# Altium PCB stm32f107rct7_devbrd.PcbDoc
Units mm, origin at the board's own origin, x right, y up, seen from the top; angles counter-clockwise.
Board outline 70 x 40 mm, 2 copper layers (Top Layer, Bottom Layer); 37 components, 65 nets, 219 pads, 61 vias.
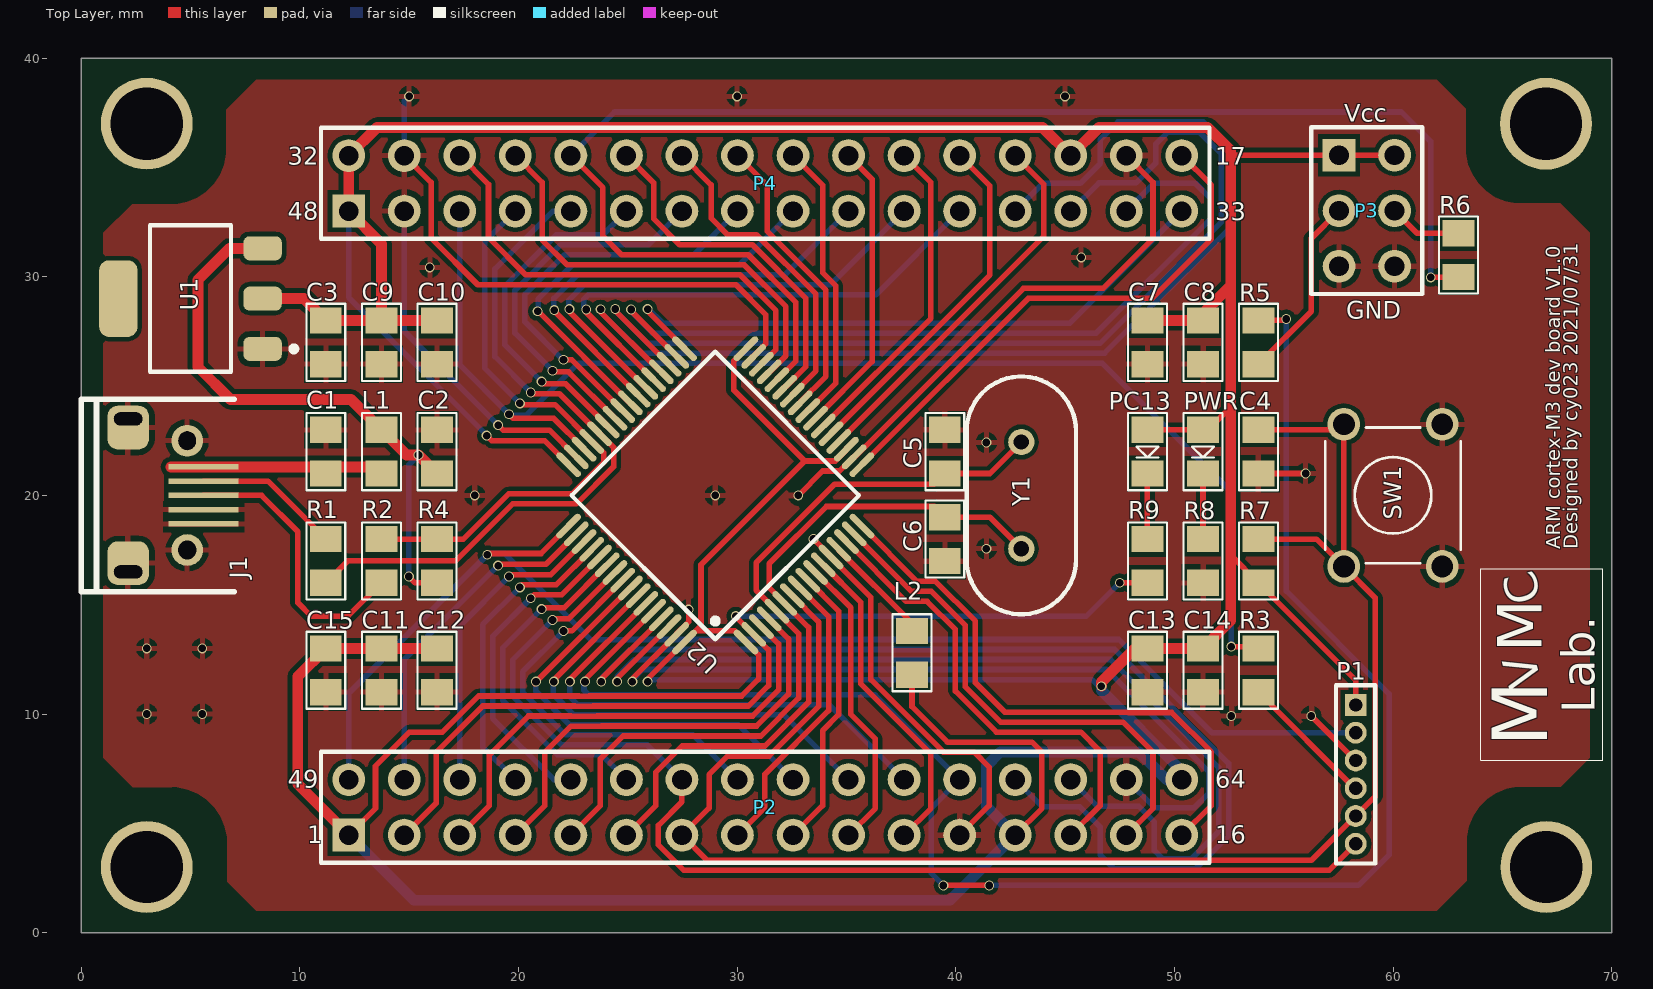
[diagram p0: Top Layer view]
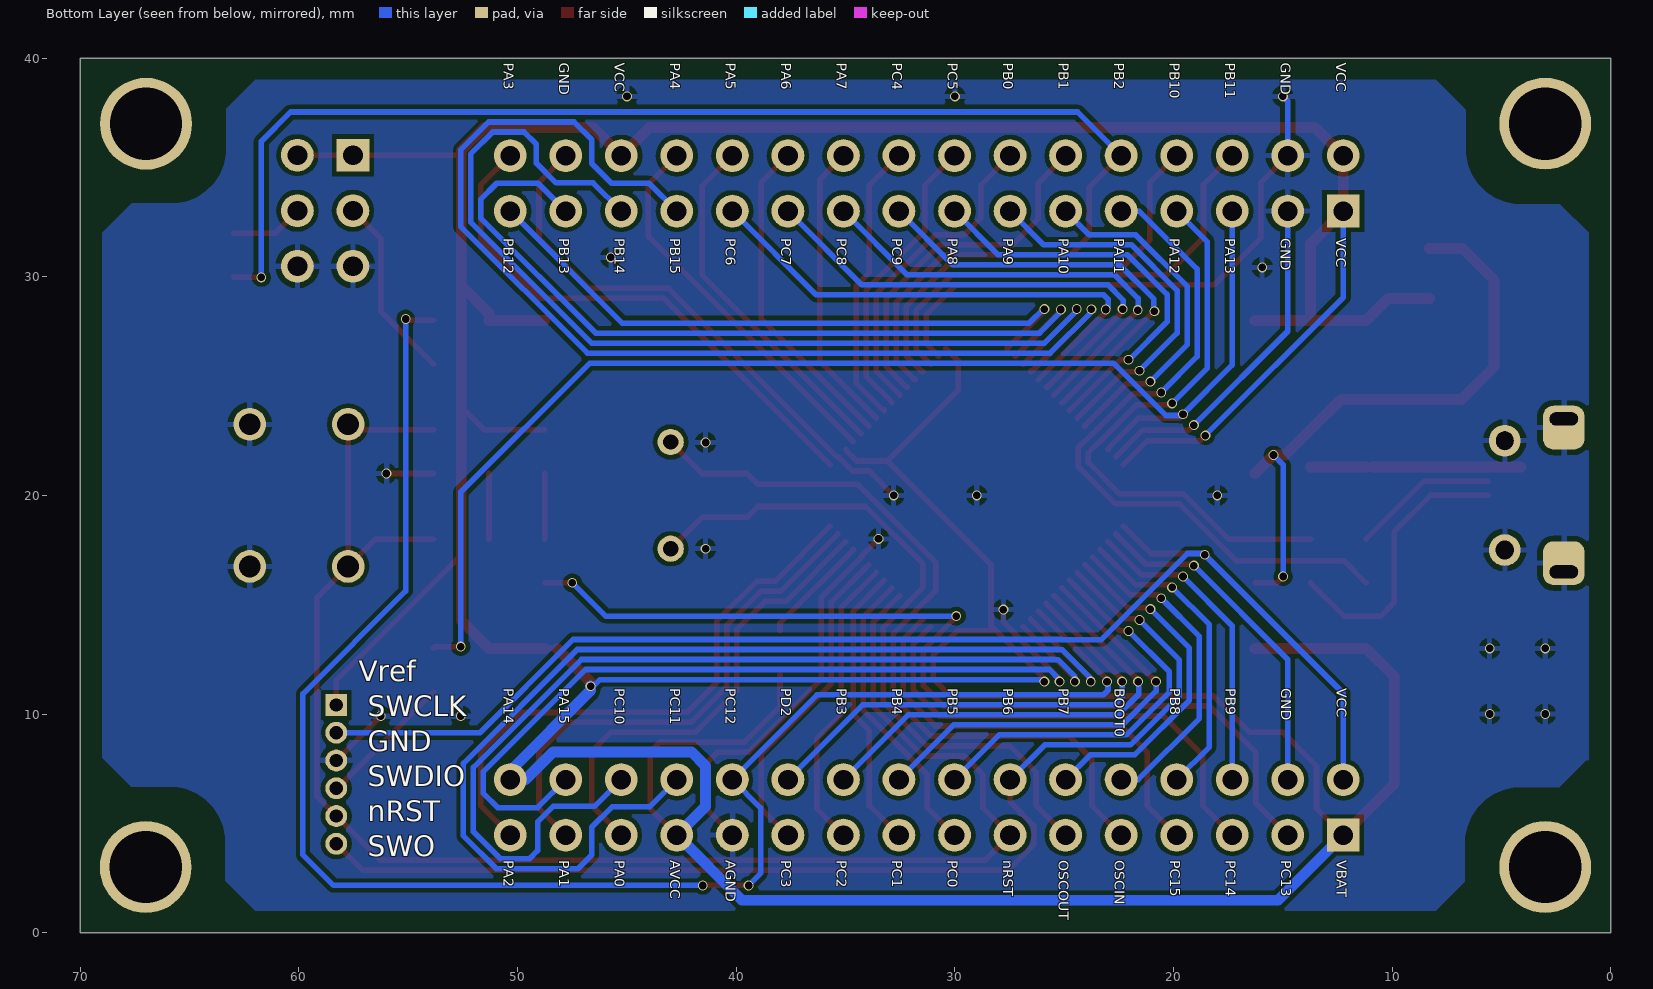
[diagram p1: Bottom Layer view, seen from below]
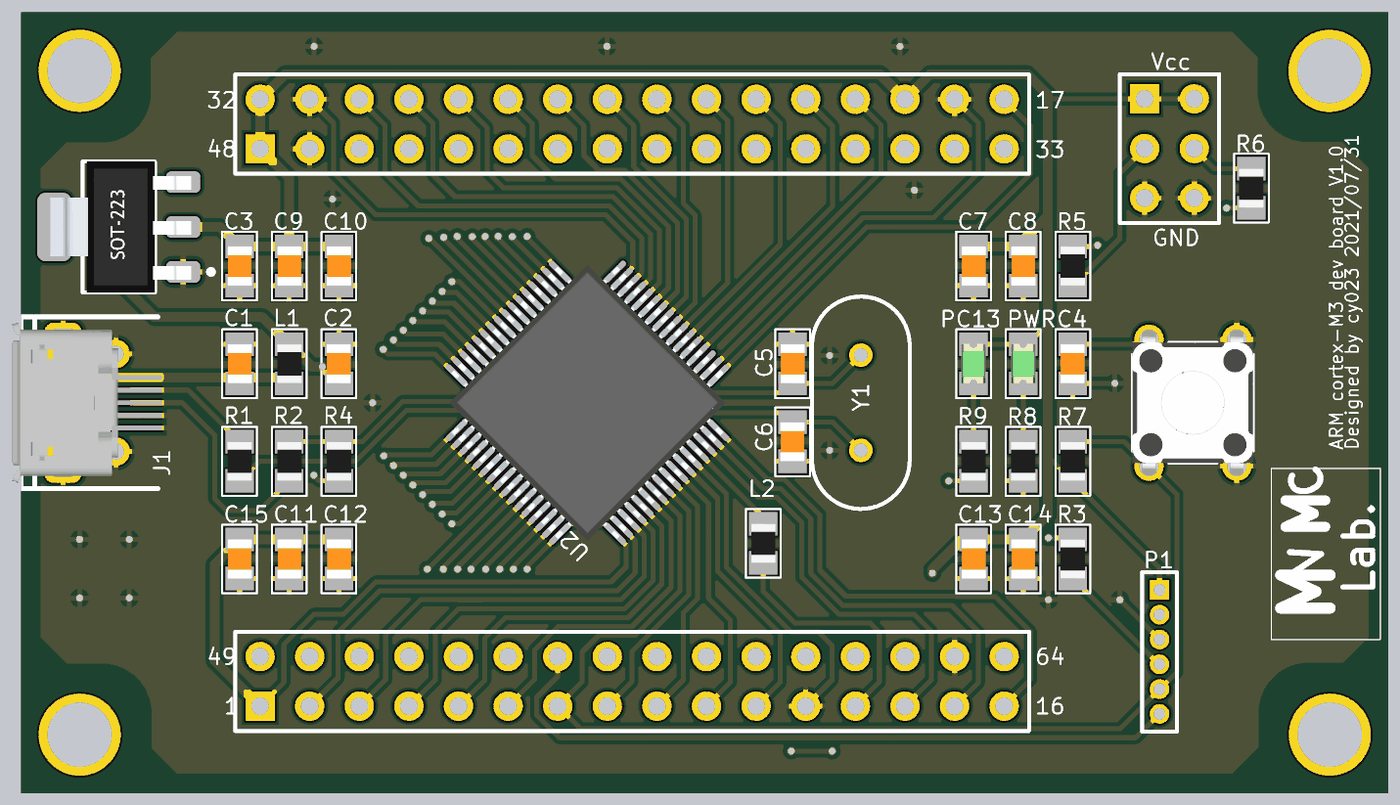
[diagram p2: 3D render of the assembled board from above, using the file's embedded part models]

## Layer stack, top to bottom
Top Solder: solder mask 0.0102, Solder Resist, Dk 3.5
Top Layer: signal copper 0.0356
Dielectric 1: dielectric 0.32, FR-4, Dk 4.8
Bottom Layer: signal copper 0.0356
Bottom Solder: solder mask 0.0102, Solder Resist, Dk 3.5

## Board outline
0,0 70,0 70,40 0,40

## Design rules (kind name [scope] priority, off if disabled: settings)
Clearance [All] p1: gap=0.203 ignorepadtopadclearanceinfootprint=TRUE
HoleSize [All] p1: absolutevalues=TRUE maxlimit=5.08 minlimit=0.254 maxpercent=80.000 minpercent=20.000
MinimumSolderMaskSliver [All] p1: minsoldermaskwidth=0.025
PolygonConnect [All] p1: connectstyle=Relief reliefconductorwidth=0.254 reliefentries=4 polygonreliefangle="90 Angle" airgapwidth=0.254
RoutingVias [All] p1: holewidth=0.406 width=0.61 viastyle="Through Hole" minholewidth=0.35 minwidth=0.45 maxholewidth=1.016 maxwidth=1.27
SilkToSilkClearance [All] p1: silktosilkclearance=0.025
SilkToSolderMaskClearance [IsPad] p1: minsilkscreentomaskgap=0 clearancetoexposedcopper=TRUE
SolderMaskExpansion [All] p1: expansion=0.102
Width [All] p1: maxlimit=5.08 minlimit=0.254 preferedwidth=0.254
26 further rules are at their usual default settings.

## Components (designator, comment, footprint, x,y, rotation, side; value= is the part's Value field where it differs from the comment)
C1 "10nF" SMD0805_CAP 11.192,22 r0 top
C2 "10uF" SMD0805_CAP 16.272,22 r180 top
C3 "10uF" SMD0805_CAP 11.192,27 r0 top
C4 "100nF" SMD0805_CAP 53.848,22 r180 top locked
C5 "22pF" SMD0805_CAP 39.5,22 r0 top locked
C6 "22pF" SMD0805_CAP 39.5,18 r180 top locked
C7 "100nF" SMD0805_CAP 48.768,27 r0 top locked
C8 "4.7uF" SMD0805_CAP 51.308,27 r0 top locked
C9 "100nF" SMD0805_CAP 13.732,27 r0 top
C10 "4.7uF" SMD0805_CAP 16.272,27 r0 top
C11 "100nF" SMD0805_CAP 13.732,12 r0 top
C12 "4.7uF" SMD0805_CAP 16.272,12 r0 top
C13 "100nF" SMD0805_CAP 48.768,12 r0 top locked
C14 "4.7uF" SMD0805_CAP 51.308,12 r0 top locked
C15 "100nF" SMD0805_CAP 11.192,12 r0 top
J1 "MicroUSB_B" micro_usb_molex_105017-0001 0,20 r0 top locked
L1 "Bead" SMD0805 13.732,22 r0 top
L2 "Bead" SMD0805 38,12.8 r0 top value=10mH
P1 "ISP" ISP 57.393,11.314 r270 top
P2 "Header 16X2A" HDR2X16_CEN 12.237,4.46 r0 top locked
P3 "Header 3X2" HDR2X3 57.531,35.56 r270 top
P4 "Header 16X2A" HDR2X16_CEN 12.237,33 r0 top locked
PC13 "LED0" LED 48.768,22 r270 top locked (schematic designator PC1)
PWR "LED0" LED 51.308,22 r270 top locked (schematic designator PWR1)
R1 "22R" SMD0805 11.192,17 r180 top
R2 "22R" SMD0805 13.732,17 r0 top
R3 "22R" SMD0805 53.848,12 r180 top locked
R4 "1K" SMD0805 16.272,17 r0 top
R5 "100K" SMD0805 53.848,27 r180 top locked
R6 "100K" SMD0805 62.992,30.988 r180 top
R7 "100K" SMD0805 53.848,17 r180 top locked value=10k
R8 "1K" SMD0805 51.308,17 r0 top locked
R9 "1K" SMD0805 48.768,17 r0 top locked
SW1 "Switch" 430156050726 60,20 r90 top
U1 "NCP1117" SOT-223-2 5,29 r90 top locked
U2 "STM32F107RCT7" QFP50P1200X1200X160-64N 29,20 r135 top locked
Y1 "8MHz" XTAL 43,20 r270 top locked

## Footprints (in the part's own frame and the unit in brackets; to place one, negate y for a bottom-side part, rotate by r counter-clockwise, add the part's x,y. Pads: shape width x height; smd on the part's side, far side on the other; paste and mask are expansions set on the pad)
430156050726 [mm] "6*6mm vertical type, THT, height 5.0mm, white actuator, 260gf, Bulk"
  round 1.5 hole 1: 1(-3.25,2.25) 2(-3.25,-2.25) 3(3.25,2.25) 4(3.25,-2.25)
  silkscreen extent -3.1,-3.1 3.1,3.1, body extent -3.95,-3.1 3.95,3.1, height 5
HDR2X3 [mm] "Connector; Header; 3x2 Position"
  rect 1.5x1.5 hole 0.9: 1(0,0)
  round 1.5 hole 0.9: 2(0,2.54) 3(2.54,0) 4(2.54,2.54) 5(5.08,0) 6(5.08,2.54)
  silkscreen extent -1.27,-1.27 6.35,3.81
HDR2X16_CEN [mm] "Connector; Header; 16x2 Position"
  rect 1.5x1.5 hole 0.9: 1(0,0)
  round 1.5 hole 0.9: 2(2.54,0) 3(5.08,0) 4(7.62,0) 5(10.16,0) 6(12.7,0) 7(15.24,0) 8(17.78,0) 9(20.32,0) 10(22.86,0) 11(25.4,0) 12(27.94,0) 13(30.48,0) 14(33.02,0) 15(35.56,0) 16(38.1,0) 17(0,2.54) 18(2.54,2.54) 19(5.08,2.54) 20(7.62,2.54) 21(10.16,2.54) 22(12.7,2.54) 23(15.24,2.54) 24(17.78,2.54) 25(20.32,2.54) 26(22.86,2.54) 27(25.4,2.54) 28(27.94,2.54) 29(30.48,2.54) 30(33.02,2.54) 31(35.56,2.54) 32(38.1,2.54)
  silkscreen extent -1.27,-1.27 39.37,3.81
ISP [mm]
  rect 1x1 hole 0.6: 1(0.9,0.9)
  round 1 hole 0.6: 2(2.17,0.9) 3(3.44,0.9) 4(4.71,0.9) 5(5.98,0.9) 6(7.25,0.9)
  silkscreen extent 0,0 8.15,1.8
LED [mm]
  rect 1.2x1.45 smd: 1(-1,0) 2(1,0)
  silkscreen extent -1.76,-0.89 1.76,0.89, body extent -2.54,-0.63 1.01,0.62, height 1.1
micro_usb_molex_105017-0001 [mm]
  rect 3.2x0.25 smd: 1(5.6,1.3) 2(5.6,0.65) 3(5.6,0) 4(5.6,-0.65) 5(5.6,-1.3)
  rrect50% 1.9x2 hole 0.6 slot 1.3 at 0 deg copper offset 0,0.4: 5(2.15,-3.5)
  rrect50% 1.9x2 hole 0.6 slot 1.3 at 0 deg copper offset 0,-0.4: 5(2.15,3.5)
  round 1.45 hole 0.85: 5(4.85,-2.5)
  round 1.45 hole 0.85 slot 0.8 at 0 deg: 5(4.85,2.5)
  silkscreen extent 0,-4.4 7,4.4, body extent -0.45,-4.1 4.95,4.1, height 2.78
QFP50P1200X1200X160-64N [mm]
  oval 1.475x0.3 smd: 1(-5.738,3.75) 2(-5.738,3.25) 3(-5.738,2.75) 4(-5.738,2.25) 5(-5.738,1.75) 6(-5.738,1.25) 7(-5.738,0.75) 8(-5.738,0.25) 9(-5.738,-0.25) 10(-5.738,-0.75) 11(-5.738,-1.25) 12(-5.738,-1.75) 13(-5.738,-2.25) 14(-5.738,-2.75) 15(-5.738,-3.25) 16(-5.738,-3.75) 33(5.738,-3.75) 34(5.738,-3.25) 35(5.738,-2.75) 36(5.738,-2.25) 37(5.738,-1.75) 38(5.738,-1.25) 39(5.738,-0.75) 40(5.738,-0.25) 41(5.738,0.25) 42(5.738,0.75) 43(5.738,1.25) 44(5.738,1.75) 45(5.738,2.25) 46(5.738,2.75) 47(5.738,3.25) 48(5.738,3.75)
  oval 0.3x1.475 smd: 17(-3.75,-5.738) 18(-3.25,-5.738) 19(-2.75,-5.738) 20(-2.25,-5.738) 21(-1.75,-5.738) 22(-1.25,-5.738) 23(-0.75,-5.738) 24(-0.25,-5.738) 25(0.25,-5.738) 26(0.75,-5.738) 27(1.25,-5.738) 28(1.75,-5.738) 29(2.25,-5.738) 30(2.75,-5.738) 31(3.25,-5.738) 32(3.75,-5.738) 49(3.75,5.738) 50(3.25,5.738) 51(2.75,5.738) 52(2.25,5.738) 53(1.75,5.738) 54(1.25,5.738) 55(0.75,5.738) 56(0.25,5.738) 57(-0.25,5.738) 58(-0.75,5.738) 59(-1.25,5.738) 60(-1.75,5.738) 61(-2.25,5.738) 62(-2.75,5.738) 63(-3.25,5.738) 64(-3.75,5.738)
  silkscreen extent -4.65,-4.65 4.65,4.65, body extent -6,-6 6,6, height 1.6
SMD0805 [mm]
  rect 1.45x1.2 smd: 1(0,-1) 2(0,1)
  silkscreen extent -0.89,-1.76 0.89,1.76, body extent -0.62,-1 0.63,1, height 0.5
SMD0805_CAP [mm]
  rect 1.45x1.2 smd: 1(0,-1) 2(0,1)
  silkscreen extent -0.89,-1.76 0.89,1.76, body extent -0.61,-1 0.64,1, height 0.8
SOT-223-2 [mm] "SOT-223/SC-73; 4 Leads; Body 6.7 x 7.3 mm, inc. leads (LxW max)"
  rrect50% 1.1x1.75 smd: 1(-2.3,-3.3) 2(0,-3.3) 3(2.3,-3.3)
  rrect50% 3.5x1.75 smd: 4(0,3.3)
  silkscreen extent -3.35,-4.85 3.35,1.85, body extent -3.35,-3.7 3.35,3.5, height 1.85
XTAL [mm]
  round 1.2 hole 0.7: 1(-2.44,0) 2(2.44,0)
  silkscreen extent -5.44,-2.5 5.44,2.5

## Part data
C1 C2 C3 C5 C6 C7 C8 C9 C10 C11 C12 C13 C14 C15: library part "Cap Semi", "Capacitor (Semiconductor SIM Model)", LatestRevisionDate=29-May-2009, LatestRevisionNote="IPC-7351 Footprint Added.", PackageDescription="Chip Capacitor", PackageReference=C1206, Published=8-Jun-2000, Publisher="Altium Limited"
C4: library part Cap, "Capacitor (Semiconductor SIM Model)"
L1 L2: library part Inductor, "Inductor", Code_IEC=1005, Code_JEITA=0402, LatestRevisionDate=29-May-2009, LatestRevisionNote="IPC-7351 Footprint Added.", PackageDescription="Chip Inductor", PackageReference=0402-A, Published=8-Jun-2000, Publisher="Altium Limited"
P1: library part MHDR1X6, "Header, 6-Pin", LatestRevisionDate=17-Jul-2002, LatestRevisionNote="Re-released for DXP Platform.", Publisher="Altium Limited"
P2 P4: "Header, 16-Pin, Dual row", LatestRevisionDate=17-Jul-2002, LatestRevisionNote="Re-released for DXP Platform.", Publisher="Altium Limited"
P3: "Header, 3-Pin, Dual row", LatestRevisionDate=17-Jul-2002, LatestRevisionNote="Re-released for DXP Platform.", Publisher="Altium Limited"
PC13 PWR: "Typical INFRARED GaAs LED", LatestRevisionDate=08-Jul-2005, LatestRevisionNote="Mech Layer 1 removed.", PackageDescription="LED; 2 Leads", PackageReference=LED-0, Published=8-Jun-2000, Publisher="Altium Limited"
R1 R2 R3 R4 R5 R6 R8 R9: library part "Res Semi", "Semiconductor Resistor", LatestRevisionDate=17-Jul-2002, LatestRevisionNote="Re-released for DXP Platform.", PackageDescription="Axial Device, Thru-Hole; 2 Leads; 0.5 in Pin Spacing", PackageReference=AXIAL-0.5, Published=8-Jun-2000, Publisher="Altium Limited"
R7: library part Res, "Semiconductor Resistor"
SW1: library part 430156050726, "WS-TATV THT Tact Switch 6X6 mm", ComponentLink1Description="Manufacturer URL", ComponentLink1URL=http://www.we-online.com, ComponentLink2Description=Datasheet, ComponentLink2URL=http://katalog.we-online.de/em/datasheet/4301x6.pdf, NoPins=04, PackageReference=430156050726, PartNumber=430156050726
U1: "IC REG 5V 1A DPAC"
U2: "Integrated Circuit", Manufacturer_Name=STMicroelectronics, Mouser2 Part Number=511-STM32F107RCT7, Datasheet Link=https://componentsearchengine.com//STM32F107RCT7.pdf, Height=1.6mm, Manufacturer_Part_Number=STM32F107RCT7, Mouser2 Price/Stock=https://www.mouser.com/Search/Refine.aspx?Keyword=511-STM32F107RCT7
Y1: library part XTAL, "Crystal Oscillator 8MHz", LatestRevisionDate=17-Jul-2002, LatestRevisionNote="Re-released for DXP Platform.", PackageDescription="Crystal, Thru-Hole; 2 Leads; Body 3.1 x 8.2 mm (Dia.xH)", PackageReference=R38, Published=8-Jun-2000, Publisher="Altium Limited"

## Free pads (board coordinates)
  round 4.2 hole 3.3: ""(3,3) ""(3,37) ""(66.993,36.996) ""(67.011,3.001)

## Via types
v1: diameter 0.45, hole 0.35, Top Layer to Bottom Layer, tented both sides, 61 vias

## Nets (pads, with @x,y where several pads share a name; then routed paths per layer and width w, separated by ;. In a path a pad name is that pad's centre, name@x,y a point inside that pad or via, vN(x,y) a via of type N, cw(c..) or ccw(c..) an arc to the next point about the centre after c; other vN are vias at no path point)
BOOT0: P2.28 R5.1 U2.60 | length 78
  Top Layer w0.254: v1@22.998,11.523 U2.60 ; v1(39.432,2.159) v1(41.529,2.159) ; R5.1 55.051,28 v1(55.118,28.067)
  Bottom Layer w0.254: v1@22.998,11.376 22.998,11.088 23.215,10.871 36.306,10.871 P2.28 38.882,5.705 38.882,2.709 v1(39.432,2.159) ; v1(41.529,2.159) 58.42,2.159 59.817,3.556 59.817,10.922 55.118,15.621 v1(55.118,28.067)
  other v1: 23.04,11.48
BOOT1: P4.21 R6.2 U2.28 | length 66.5
  Top Layer w0.254: P4.21 23.857,34.08 23.857,31.863 24.715,31.005 30.509,31.005 32.69,28.825 32.69,26.137 31.876,25.323 31.82,25.323 U2.28 ; v1(61.722,29.972) 62.976,29.972 R6.2
  Bottom Layer w0.254: P4.21 24.392,37.535 60.382,37.535 61.722,36.195 v1(61.722,29.972)
GND: C1.2 C2.1 C3.1 C4.2 C5.2 C6.2 C7.1 C8.1 C9.1 C10.1 C11.1 C12.1 C13.1 C14.1 C15.1 J1.4 J1.5 P1.3 P2.12 P2.31 P3.5 P3.6 P4.2 P4.18 P4.31 R8.1 SW1.2 SW1.4 U1.1 U2.12 U2.18 U2.31 U2.47 U2.63 | length 129.1
  Top Layer w0.254: P4.18 16.002,34.315 16.002,31.771 18.14,29.634 29.941,29.634 31.318,28.256 31.318,26.942 30.745,26.369 U2.31 ; v1(19.07,23.213) 19.296,22.987 21.417,22.987 U2.47 ; v1@25.152,11.43 25.209,11.487 25.146,11.55 U2.63 27.241,13.673 27.783,14.215 v1(27.783,14.773) ; v1(32.8,20) 33.914,21.114 34.682,21.114 35.327,21.759 U2.18 35.383,21.759 43.095,29.471 46.743,29.471 49.022,31.75 49.022,34.315 P4.31 ; v1(33.492,18.011) 34.267,17.236 34.267,17.18 U2.12 34.295,17.152 36.116,15.331 36.116,11.571 39.432,8.255 40.846,8.255 41.529,7.572 41.529,5.812 P2.12 ; C4.2 v1(56,21) ; v1(56.261,9.906) P1.3
  Bottom Layer w0.254: P4.2 14.777,27.506 v1(19.07,23.213) ; P4.18 14.777,38.027 v1(15,38.25) ; v1@25.146,11.46 25.173,11.487 25.209,11.487 25.209,11.566 25.678,12.035 46.893,12.035 51.562,7.366 51.562,6.369 50.908,5.715 49.082,5.715 P2.31
  other v1: 52.603,9.909 3,10 5.54,10 25.209,11.48 3,13 5.54,13 41.402,17.56 18,20 29,20 41.402,22.417 15.945,30.428 45.738,30.885 30,38.25 45,38.25
NetJ1_2: J1.2 R1.1 | length 6.7
  Top Layer w0.254: J1.2 8.542,20.65 R1.1
NetJ1_3: J1.3 R2.1 | length 13
  Top Layer w0.254: J1.3 8.253,20 9.906,18.347 9.906,15.093 10.521,14.478 12.21,14.478 R2.1
NetP1_4: P1.4 R3.2 | length 6.3
  Top Layer w0.254: R3.2 58.244,6.604 P1.4
NetP3_3: P3.3 R5.2 | length 8.5
  Top Layer w0.254: R5.2 56.261,28.413 56.261,31.75 P3.3
NetP3_4: P3.4 R6.1 | length 3.3
  Top Layer w0.254: P3.4 61.103,31.988 R6.1
NetPC1_2: PC13.2 R9.2 | length 3
  Top Layer w0.254: R9.2 PC13.2
NetPWR1_2: PWR.2 R8.2 | length 3
  Top Layer w0.254: R8.2 PWR.2
nRST: C4.1 P1.5 P2.7 R7.1 SW1.1 SW1.3 U2.7 | length 74.6
  Top Layer w0.254: U2.7 33.731,14.208 33.731,10.348 31.463,8.08 29.57,8.08 28.719,7.23 28.719,5.702 P2.7 28.635,3.302 56.261,3.302 P1.5 59.182,6.223 59.182,15.318 SW1.1 ; R7.1 56.5,18 SW1.1 ; C4.1 57.5,23 SW1.3 SW1.1
OSCIN: C5.1 P2.5 U2.5 Y1.1 | length 35.7
  Top Layer w0.254: P2.5 23.749,5.812 23.749,7.953 24.79,8.995 31.084,8.995 32.817,10.727 32.817,13.68 31.82,14.677 U2.5 30.876,15.649 30.876,16.929 34.457,20.51 39.01,20.51 C5.1 41.56,21 Y1.1
OSCOUT: C6.1 P2.6 U2.6 Y1.2 | length 32.3
  Top Layer w0.254: P2.6 26.289,5.812 26.289,7.34 27.487,8.537 31.274,8.537 33.274,10.538 33.274,13.958 U2.6 32.173,15.087 31.466,15.794 31.466,16.873 34.083,19.49 39.01,19.49 C6.1 41.56,19 Y1.2
PA0: P2.14 U2.14 | length 21.6
  Top Layer w0.254: U2.14 37.734,15.155 38.693,15.155 39.98,13.868 39.98,11.051 41.861,9.169 45.723,9.169 46.609,8.283 46.609,5.812 P2.14
PA1: P2.15 U2.15 | length 23.8
  Top Layer w0.254: U2.15 37.984,15.613 38.882,15.613 40.437,14.058 40.437,11.241 42.051,9.627 47.65,9.627 49.022,8.255 49.022,5.685 P2.15
PA2: P2.16 U2.16 | length 26.3
  Top Layer w0.254: U2.16 38.234,16.07 39.071,16.07 40.894,14.247 40.894,11.43 42.24,10.084 47.892,10.084 47.906,10.07 49.874,10.07 51.689,8.255 51.689,5.812 P2.16
PA3: P4.32 U2.17 | length 24.6
  Top Layer w0.254: U2.17 43.317,29.014 48.978,29.014 51.689,31.725 51.689,34.188 P4.32
PA4: P4.29 U2.20 | length 17.5
  Top Layer w0.254: U2.20 44.021,31.839 44.021,34.236 P4.29
PA5: P4.28 U2.21 | length 16.3
  Top Layer w0.254: U2.21 41.56,30.085 41.56,34.157 P4.28
PA6: P4.27 U2.22 | length 14.9
  Top Layer w0.254: U2.22 38.862,28.094 38.862,34.315 P4.27
PA7: P4.26 U2.23 | length 13.5
  Top Layer w0.254: U2.23 36.177,26.117 36.177,34.46 P4.26
PA8: P4.8 U2.41 | length 18.7
  Top Layer w0.254: v1(22.057,26.2) 22.446,26.2 U2.41
  Bottom Layer w0.254: v1(22.057,26.2) 22.037,26.2 20.296,27.941 20.296,29.188 22.113,31.005 28.022,31.005 P4.8
PA9: P4.7 U2.42 | length 17.3
  Top Layer w0.254: v1(21.559,25.702) 21.616,25.645 22.295,25.645 U2.42
  Bottom Layer w0.254: v1(21.559,25.702) 19.838,27.423 19.838,29.377 21.924,31.463 25.94,31.463 P4.7
PA10: P4.6 U2.43 | length 15.9
  Top Layer w0.254: v1(21.061,25.204) 21.159,25.106 22.154,25.106 24.031,23.229 24.031,23.173 U2.43
  Bottom Layer w0.254: v1(21.061,25.204) 19.381,26.884 19.381,29.567 21.735,31.92 23.857,31.92 P4.6
PA11: P4.5 R1.2 U2.44 | length 32
  Top Layer w0.254: R1.2 12.192,17 17.127,17 19.736,19.609 22.651,19.609 24.351,21.309 24.351,22.202 23.761,22.792 23.705,22.792 U2.44 21.876,24.649 20.621,24.649 v1(20.563,24.707)
  Bottom Layer w0.254: v1(20.563,24.707) 18.924,26.346 18.924,30.354 21.57,33 P4.5
PA12: P4.4 R2.2 R4.2 U2.45 | length 26.9
  Top Layer w0.254: R2.2 R4.2 17.48,18 19.546,20.066 22.461,20.066 23.894,21.499 23.894,21.952 23.394,22.452 23.338,22.452 U2.45 21.667,24.151 20.123,24.151 v1(20.066,24.209)
  Bottom Layer w0.254: P4.4 18.467,31.61 18.467,25.807 v1(20.066,24.209)
PA13: P4.3 R3.1 U2.46 | length 59.2
  Top Layer w0.254: v1(19.568,23.711) 19.752,23.527 21.612,23.527 22.97,22.169 22.97,22.113 U2.46 ; v1(52.603,13.081) 53.767,13.081 R3.1
  Bottom Layer w0.254: P4.3 17.317,25.962 v1(19.568,23.711) 19.625,23.654 20.348,23.654 22.746,26.051 46.696,26.051 52.603,20.144 v1(52.603,13.081)
PA14: P1.2 P2.17 U2.49 | length 60.3
  Top Layer w0.254: v1(18.572,17.285) 18.63,17.342 21.039,17.342 U2.49
  Bottom Layer w0.254: P2.17 12.237,10.949 v1(18.572,17.285) 18.63,17.342 19.361,17.342 23.298,13.405 25.108,13.405 25.11,13.407 47.461,13.407 51.724,9.144 P1.2
PA15: P2.18 U2.50 | length 15.7
  Top Layer w0.254: v1(19.07,16.787) 19.127,16.844 21.248,16.844 U2.50
  Bottom Layer w0.254: P2.18 14.777,12.494 v1(19.07,16.787)
PB0: P4.23 U2.26 | length 14.7
  Top Layer w0.254: P4.23 28.812,34.205 28.812,32.677 29.57,31.92 30.888,31.92 33.604,29.203 33.604,25.693 32.527,24.616 U2.26
PB1: P4.22 U2.27 | length 16.4
  Top Layer w0.254: P4.22 26.179,34.298 26.179,32.656 27.373,31.463 30.698,31.463 33.147,29.014 33.147,25.887 32.229,24.969 32.173,24.969 U2.27
PB3: P1.6 P2.23 U2.55 | length 53.6
  Top Layer w0.254: v1(21.559,14.298) 21.616,14.355 22.295,14.355 U2.55 ; P2.23 27.477,5.988 26.397,4.907 26.397,4.013 27.565,2.845 57.074,2.845 P1.6
  Bottom Layer w0.254: v1(21.559,14.298) 19.733,12.471 19.733,10.82 21.968,8.585 25.892,8.585 P2.23
PB4: P2.24 U2.56 | length 18.7
  Top Layer w0.254: v1(22.057,13.8) 22.446,13.8 U2.56
  Bottom Layer w0.254: v1(22.057,13.8) 20.19,11.933 20.19,11.01 22.157,9.042 27.975,9.042 P2.24
PB5: P2.25 U2.57 | length 20.1
  Top Layer w0.254: v1@20.745,11.391 20.745,11.409 25.102,15.766 U2.57
  Bottom Layer w0.254: v1(20.8,11.48) 20.8,11.046 22.346,9.5 30.057,9.5 P2.25
PB6: P2.26 U2.58 | length 21.2
  Top Layer w0.254: v1@21.59,11.48 21.59,11.529 U2.58
  Bottom Layer w0.254: v1@21.59,11.48 21.59,10.903 22.536,9.957 32.14,9.957 P2.26
  other v1: 21.62,11.48
PB7: P2.27 U2.59 | length 22.6
  Top Layer w0.254: v1@22.38,11.48 22.38,11.612 U2.59 U2.59@25.819,15.059
  Bottom Layer w0.254: v1(22.35,11.48) 22.35,10.789 22.725,10.414 34.223,10.414 P2.27
PB8: P2.29 U2.61 | length 51.8
  Top Layer w0.254: v1@23.749,11.43 23.749,11.547 v1@23.759,11.557 ; v1@23.766,11.55 v1@23.759,11.557 ; U2.61 23.749,11.567 v1@23.759,11.557
  Bottom Layer w0.254: v1@23.749,11.43 23.749,11.6 25.097,12.947 25.297,12.947 25.299,12.95 47.272,12.95 52.476,7.745 52.476,4.425 50.974,2.923 47.242,2.923 46.609,3.556 46.609,4.826 45.68,5.755 43.962,5.755 P2.29
  other v1: 23.79,11.48
PB9: P2.30 U2.62 | length 46.3
  Top Layer w0.254: v1@24.511,11.43 24.505,11.43 24.412,11.523 U2.62
  Bottom Layer w0.254: v1@24.511,11.43 24.511,11.715 25.286,12.49 25.486,12.49 25.489,12.492 47.082,12.492 52.019,7.555 52.019,4.615 50.784,3.38 49.452,3.38 49.082,3.75 49.082,5.068 48.375,5.775 46.482,5.775 P2.30
  other v1: 24.511,11.48
PB10: P4.20 U2.29 | length 20.1
  Top Layer w0.254: P4.20 21.082,34.315 21.082,31.689 22.223,30.548 30.32,30.548 32.233,28.635 32.233,26.387 31.522,25.676 31.466,25.676 U2.29
PB11: P4.19 U2.30 | length 21.5
  Top Layer w0.254: P4.19 18.63,34.227 18.63,31.789 20.328,30.091 30.13,30.091 31.775,28.446 31.775,26.664 U2.30
PB12: P4.16 U2.33 | length 29.4
  Top Layer w0.254: v1@25.908,28.572 v1(25.908,28.52) 25.908,28.431 27.594,26.745 U2.33
  Bottom Layer w0.254: v1@25.908,28.572 26.6,27.88 45.217,27.88 P4.16
PB13: P4.15 U2.34 | length 38
  Top Layer w0.254: v1(25.152,28.502) 25.152,28.444 U2.34 U2.34@27.215,26.355
  Bottom Layer w0.254: v1(25.152,28.502) 25.24,28.502 25.146,28.408 26.131,27.423 46.427,27.423 51.689,32.685 51.689,33.54 50.954,34.275 49.072,34.275 P4.15
PB14: P4.14 U2.35 | length 46.7
  Top Layer w0.254: v1@24.412,28.524 24.412,28.449 26.831,26.03 26.887,26.03 U2.35
  Bottom Layer w0.254: v1@24.412,28.524 24.412,28.456 25.903,26.966 46.616,26.966 52.146,32.495 52.146,35.611 51.137,36.62 49.701,36.62 49.149,36.068 49.149,35.199 48.24,34.29 46.547,34.29 P4.14
  other v1: 24.43,28.524
PB15: P4.13 U2.36 | length 52.4
  Top Layer w0.254: v1(23.759,28.514) 23.759,28.395 26.463,25.691 26.519,25.691 26.519,25.648 U2.36
  Bottom Layer w0.254: v1(23.759,28.514) 23.759,28.392 25.642,26.508 46.806,26.508 52.603,32.306 52.603,35.8 51.326,37.077 47.415,37.077 46.609,36.271 46.609,35.179 45.705,34.275 43.992,34.275 P4.13
PC0: P2.8 U2.8 | length 13.6
  Top Layer w0.254: P2.8 31.274,5.717 31.274,7.244 34.188,10.159 34.188,14.458 U2.8
PC1: P2.9 U2.9 | length 13.1
  Top Layer w0.254: P2.9 33.909,5.812 33.909,9.233 34.646,9.97 34.646,14.708 U2.9
PC2: P2.10 U2.10 | length 13.7
  Top Layer w0.254: U2.10 35.202,14.859 35.202,9.985 36.322,8.865 36.322,5.685 P2.10
PC3: P2.11 U2.11 | length 14.9
  Top Layer w0.254: U2.11@33.941,16.799 U2.11 35.659,15.109 35.659,11.382 38.862,8.179 38.862,5.685 P2.11
PC4: P4.25 U2.24 | length 13
  Top Layer w0.254: P4.25 33.909,34.188 33.909,30.192 34.519,29.582 34.519,25.137 33.29,23.909 33.234,23.909 U2.24
PC5: P4.24 U2.25 | length 13.5
  Top Layer w0.254: P4.24 31.369,34.188 31.369,32.085 34.061,29.393 34.061,25.443 32.881,24.262 U2.25
PC6: P4.12 U2.37 | length 23.8
  Top Layer w0.254: v1@23.1,28.54 v1(23.1,28.5) 23.1,28.375 U2.37
  Bottom Layer w0.254: v1@22.987,28.575 22.987,28.968 23.196,29.177 36.354,29.177 P4.12
PC7: P4.11 U2.38 | length 22.5
  Top Layer w0.254: v1@22.295,28.575 22.295,28.445 25.799,24.941 U2.38
  Bottom Layer w0.254: v1@22.295,28.575 22.295,28.922 23.007,29.634 34.271,29.634 P4.11
  other v1: 22.33,28.52
PC8: P4.10 U2.39 | length 21.2
  Top Layer w0.254: v1@21.616,28.502 21.616,28.444 U2.39
  Bottom Layer w0.254: v1@21.616,28.502 21.616,29.006 22.702,30.091 32.188,30.091 P4.10
  other v1: 21.64,28.472
PC9: P4.9 U2.40 | length 19.9
  Top Layer w0.254: v1@20.901,28.448 20.878,28.448 25.091,24.234 U2.40
  Bottom Layer w0.254: v1@20.901,28.448 20.901,28.978 22.471,30.548 30.105,30.548 P4.9
  other v1: 20.878,28.418
PC10: P2.19 U2.51 | length 14.3
  Top Layer w0.254: v1(19.568,16.289) 19.639,16.36 21.471,16.36 U2.51
  Bottom Layer w0.254: P2.19 17.317,14.038 v1(19.568,16.289)
PC11: P2.20 U2.52 | length 14.1
  Top Layer w0.254: v1(20.066,15.791) 20.177,15.903 21.721,15.903 U2.52
  Bottom Layer w0.254: P2.20 18.361,8.496 18.361,14.087 v1(20.066,15.791)
PC12: P2.21 U2.53 | length 14.9
  Top Layer w0.254: v1(20.563,15.293) 20.716,15.446 21.971,15.446 U2.53
  Bottom Layer w0.254: v1(20.563,15.293) 18.818,13.548 18.818,9.798 21.616,7 P2.21
PC13: P2.2 R9.1 U2.2 | length 44.1
  Top Layer w0.254: P2.2 16.237,5.92 16.237,8.236 18.367,10.366 22.576,10.366 22.579,10.363 23.417,10.363 23.42,10.366 30.516,10.366 31.445,11.295 31.445,12.931 29.941,14.435 v1(29.941,14.478) ; v1(47.498,16) R9.1
  Bottom Layer w0.254: v1(29.941,14.478) 45.976,14.478 v1(47.498,16)
PC14: P2.3 U2.3 | length 21.9
  Top Layer w0.254: P2.3 18.669,5.812 18.669,8.128 20.45,9.909 22.387,9.909 22.389,9.906 23.607,9.906 23.61,9.909 30.705,9.909 31.902,11.106 31.902,13.209 U2.3
PC15: P2.4 U2.4 | length 20.4
  Top Layer w0.254: P2.4 21.209,5.812 21.209,8.255 22.403,9.449 23.796,9.449 23.799,9.452 30.895,9.452 32.36,10.917 32.36,13.43 31.452,14.338 U2.4
PD2: P2.22 U2.54 | length 15.9
  Top Layer w0.254: v1(21.061,14.796) 21.119,14.853 22.085,14.853 U2.54
  Bottom Layer w0.254: v1(21.061,14.796) 19.275,13.01 19.275,10.631 21.778,8.128 23.809,8.128 P2.22
VBUS: C1.1 J1.1 L1.1 | length 9.6
  Top Layer w0.254: C1.1@10.892,21.3 C1.1@11.192,21.299
  Top Layer w0.5: J1.1@4.102,21.3 J1.1 C1.1@10.892,21.3 ; C1.1@11.192,21.299 L1.1@13.732,21.299
VCC3V3: C3.2 C7.2 C8.2 C9.2 C10.2 C11.2 C12.2 C13.2 C14.2 C15.2 L2.1 P1.1 P2.1 P2.13 P2.32 P3.1 P3.2 P4.1 P4.17 P4.30 PC13.1 PWR.1 R7.2 U1.2 U2.1 U2.19 U2.32 U2.48 U2.64 | length 280.7
  Top Layer w0.254: P2.1 13.462,5.685 13.462,7.62 15.011,9.169 16.524,9.169 18.178,10.823 22.765,10.823 22.768,10.821 23.228,10.821 23.231,10.823 30.21,10.823 30.988,11.602 30.988,12.709 U2.1 29.897,13.8 U2.64@28.103,13.8 ; v1(18.542,22.733) 18.775,22.5 21.197,22.5 U2.48 ; v1@25.908,11.43 25.908,11.605 U2.64 U2.64@28.103,13.8 ; U2.32 29.845,26.148 29.845,24.818 33.092,21.571 ; U2.19 34.974,22.113 34.974,22.057 34.488,21.571 33.092,21.571 ; L2.1 38,10.334 39.622,8.712 43.485,8.712 43.942,8.255 43.942,5.685 P2.13 ; C13.2@48.19,13 C13.2 ; PC13.1 PWR.1 51.54,23 52.578,24.038 ; C8.2 C8.2@51.308,28.321 ; 52.578,17.272 52.578,17.27 R7.2 58.293,11.555 P1.1 ; 52.578,35.771 52.789,35.56 P3.1 P3.2 ; U2.64@28.103,13.8 28.348,14.045 28.348,16.827 33.092,21.571
  Top Layer w0.5: U1.2 10.192,29 C3.2 C9.2 ; P2.1 9.906,6.791 9.906,11.714 C15.2 C11.2 C12.2 ; C10.2 C9.2 ; v1(46.66,11.272) 46.66,11.47 C13.2@48.19,13 ; C13.2 C14.2 52.578,14.27 52.578,14.73 52.578,24.038 52.578,29.591 ; C7.2 C8.2 ; C8.2@51.308,28.321 52.578,29.591 ; C9.2 13.732,31.505 P4.1 P4.17 13.527,36.83 43.967,36.83 P4.30 46.547,36.83 51.519,36.83 52.578,35.771 52.578,29.591
  Bottom Layer w0.254: P4.1 12.237,29.051 18.555,22.733 v1(18.542,22.733) ; v1@25.908,11.43 26.054,11.576 46.228,11.576 46.532,11.272 v1(46.66,11.272) ; P2.32@49.642,7 P2.32 P2.32@50.337,7.397
  Bottom Layer w0.5: P2.1 15.216,1.481 39.738,1.481 P2.13 41.402,5.775 41.402,7.62 42.037,8.255 48.387,8.255 P2.32@49.642,7 ; v1(46.66,11.272) 46.66,11.074 P2.32@50.337,7.397
  other v1: 25.908,11.48
VCC5V: C2.2 L1.2 R4.1 U1.3 | length 27.6
  Top Layer w0.254: v1(14.986,16.289) 15.275,16 R4.1
  Top Layer w0.5: U1.3 6.792,31.3 5.334,29.842 5.334,25.88 6.83,24.384 12.348,24.384 L1.2 14.888,21.844 v1(15.428,21.844) C2.2
  Bottom Layer w0.254: v1(14.986,16.289) 14.986,21.402 v1(15.428,21.844)
VCCA: L2.2 U2.13 | length 5.1
  Top Layer w0.254: U2.13 34.648,17.506 38,14.154 L2.2
pads on no net: U1.4

## Polygon pours and split planes (outlines as drawn)
GND on Top Layer "Top Layer-No Net 1" (solid, pour order 4): 8,1 62,1 69,8 69,32 62,39 8,39 1,32 1,8
GND on Bottom Layer "Bottom Layer-No Net" (solid, pour order 10): 8,39 62,39 69,32 69,8 62,1 8,1 1.126,7.874 1,7.874 1,32 8,39

## Other copper
Top Layer:
  pour cut-out: 63.324,39.996 63.324,35.894 ccw(c65.864,35.894) 65.864,33.354 69.999,33.354 69.999,39.996
  pour cut-out: 70.011,6.676 65.909,6.676 ccw(c65.909,4.136) 63.369,4.136 63.369,0.001 70.011,0.001
  pour cut-out: 6.675,0 6.675,4.102 ccw(c4.135,4.102) 4.135,6.642 0,6.642 0,0
  pour cut-out: 0,33.325 4.102,33.325 ccw(c4.102,35.865) 6.642,35.865 6.642,40 0,40
Bottom Layer:
  pour cut-out: 63.318,39.996 63.318,35.894 ccw(c65.858,35.894) 65.858,33.354 69.993,33.354 69.993,39.996
  pour cut-out: 70.011,6.676 65.909,6.676 ccw(c65.909,4.136) 63.369,4.136 63.369,0.001 70.011,0.001
  pour cut-out: 6.675,0 6.675,4.102 ccw(c4.135,4.102) 4.135,6.642 0,6.642 0,0
  pour cut-out: 0,33.325 4.102,33.325 ccw(c4.102,35.865) 6.642,35.865 6.642,40 0,40

## Silkscreen, mask and mechanical layers (free items; w line width, h text height)
Top Overlay:
  lines w0.051: 64.008,7.874 69.596,7.874 69.596,16.637 64.008,16.637 64.008,7.874
  text "ARM cortex-M3 dev board V1.0" at 67.652,17.544 h0.65 r90
  text "Designed by cy023 2021/07/31" at 68.453,17.544 h0.65 r90
  text "C" at 66.802,15.24 h1.52 r105
  text "M" at 66.802,12.827 h2.03 r90
  text "V" at 66.802,11.43 h1.52 r105
  text "Lab." at 69.215,10.033 h1.52 r90
  text "M" at 67.056,8.509 h2.54 r90
Bottom Overlay:
  text "VCC" at 12.709,39.786 h0.8 r90
  text "GND" at 15.248,39.786 h0.8 r90
  text "PB11" at 17.788,39.786 h0.8 r90
  text "PB10" at 20.327,39.786 h0.8 r90
  text "PB2" at 22.866,39.786 h0.8 r90
  text "PB1" at 25.406,39.786 h0.8 r90
  text "PB0" at 27.945,39.786 h0.8 r90
  text "PC5" at 30.485,39.786 h0.8 r90
  text "PC4" at 33.024,39.786 h0.8 r90
  text "PA7" at 35.564,39.786 h0.8 r90
  text "PA6" at 38.103,39.786 h0.8 r90
  text "PA5" at 40.642,39.786 h0.8 r90
  text "PA4" at 43.182,39.786 h0.8 r90
  text "VCC" at 45.721,39.786 h0.8 r90
  text "GND" at 48.261,39.786 h0.8 r90
  text "PA3" at 50.8,39.786 h0.8 r90
  text "VCC" at 12.709,31.75 h0.8 r90
  text "GND" at 15.248,31.75 h0.8 r90
  text "PA13" at 17.788,31.75 h0.8 r90
  text "PA12" at 20.327,31.75 h0.8 r90
  text "PA11" at 22.866,31.75 h0.8 r90
  text "PA10" at 25.406,31.75 h0.8 r90
  text "PA9" at 27.945,31.75 h0.8 r90
  text "PA8" at 30.485,31.75 h0.8 r90
  text "PC9" at 33.024,31.75 h0.8 r90
  text "PC8" at 35.564,31.75 h0.8 r90
  text "PC7" at 38.103,31.75 h0.8 r90
  text "PC6" at 40.642,31.75 h0.8 r90
  text "PB15" at 43.182,31.75 h0.8 r90
  text "PB14" at 45.721,31.75 h0.8 r90
  text "PB13" at 48.261,31.75 h0.8 r90
  text "PB12" at 50.8,31.75 h0.8 r90
  text "VCC" at 12.7,11.176 h0.8 r90
  text "GND" at 15.24,11.176 h0.8 r90
  text "PB9" at 17.78,11.176 h0.8 r90
  text "PB8" at 20.32,11.176 h0.8 r90
  text "BOOT0" at 22.86,11.176 h0.8 r90
  text "PB7" at 25.4,11.176 h0.8 r90
  text "PB6" at 27.94,11.176 h0.8 r90
  text "PB5" at 30.48,11.176 h0.8 r90
  text "PB4" at 33.02,11.176 h0.8 r90
  text "PB3" at 35.56,11.176 h0.8 r90
  text "PD2" at 38.1,11.176 h0.8 r90
  text "PC12" at 40.64,11.176 h0.8 r90
  text "PC11" at 43.18,11.176 h0.8 r90
  text "PC10" at 45.72,11.176 h0.8 r90
  text "PA15" at 48.26,11.176 h0.8 r90
  text "PA14" at 50.8,11.176 h0.8 r90
  text "VBAT" at 12.7,3.301 h0.8 r90
  text "PC13" at 15.24,3.301 h0.8 r90
  text "PC14" at 17.78,3.301 h0.8 r90
  text "PC15" at 20.32,3.301 h0.8 r90
  text "OSCIN" at 22.86,3.301 h0.8 r90
  text "OSCOUT" at 25.4,3.301 h0.8 r90
  text "nRST" at 27.94,3.301 h0.8 r90
  text "PC0" at 30.48,3.301 h0.8 r90
  text "PC1" at 33.02,3.301 h0.8 r90
  text "PC2" at 35.56,3.301 h0.8 r90
  text "PC3" at 38.1,3.301 h0.8 r90
  text "AGND" at 40.64,3.301 h0.8 r90
  text "AVCC" at 43.18,3.301 h0.8 r90
  text "PA0" at 45.72,3.301 h0.8 r90
  text "PA1" at 48.26,3.301 h0.8 r90
  text "PA2" at 50.8,3.302 h0.8 r90
  text "Vref  /  SWCLK /  GND  /  SWDIO /  nRST  /  SWO" at 57.277,3.175 h1.6
Mechanical 1:
  the board outline again, w0.254

## Text inside footprints (layer, text, board x,y; h text height)
P2: Top Overlay "64" at 51.861,6.619 h0.8; Top Overlay "16" at 51.861,4.079 h0.8; Top Overlay "1" at 10.332,4.079 h0.8; Top Overlay "49" at 9.443,6.619 h0.8
P3: Top Overlay "Vcc" at 57.78,37.084 h0.8; Top Overlay "GND" at 57.861,28.067 h0.8
P4: Top Overlay "17" at 51.861,35.122 h0.8; Top Overlay "33" at 51.861,32.582 h0.8; Top Overlay "48" at 9.443,32.615 h0.8; Top Overlay "32" at 9.443,35.122 h0.8